# Altium PCB Serial_Sniffer.PcbDoc
Units mm, origin at the board's own origin, x right, y up, seen from the top; angles counter-clockwise.
Board outline 38.86 x 8.64 mm, 2 copper layers (Top Layer, Bottom Layer), stack 1.58 mm thick; 5 components, 5 nets, 12 pads, 0 vias.
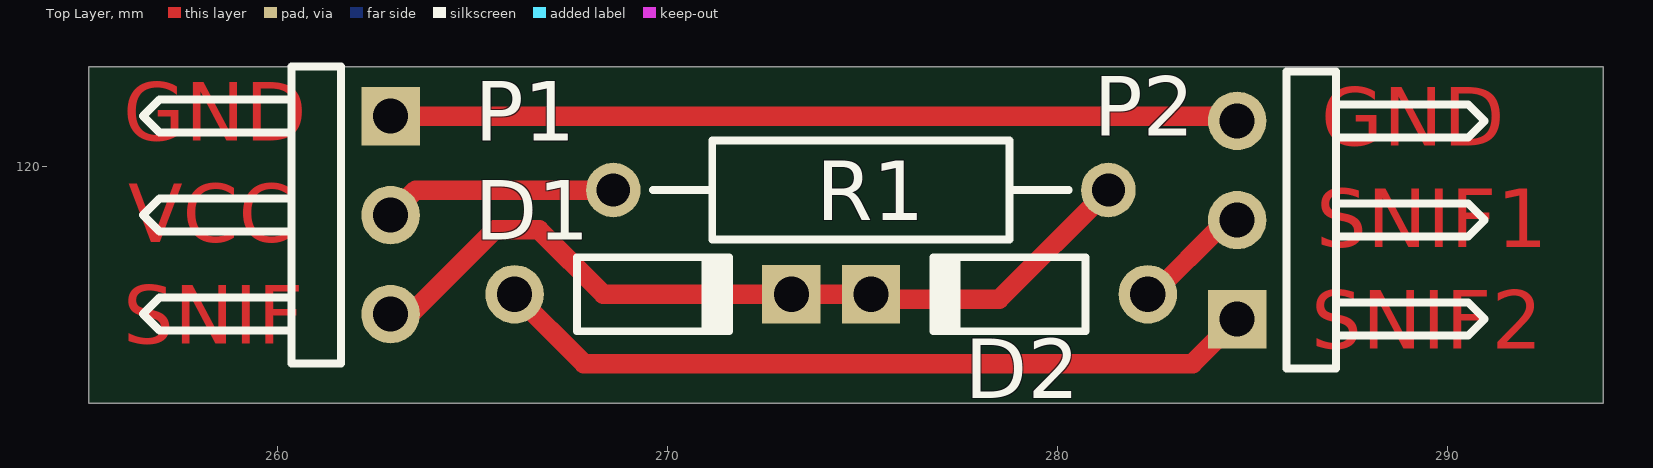
[diagram p0: Top Layer view]
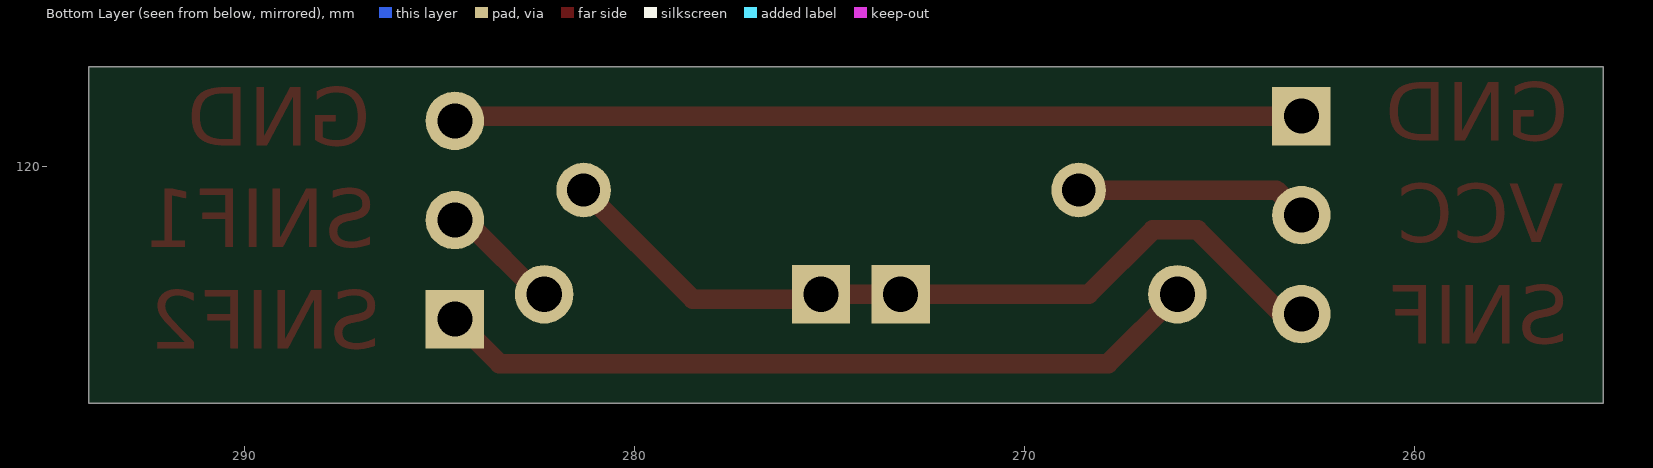
[diagram p1: Bottom Layer view, seen from below]

## Layer stack, top to bottom
Top Solder: solder mask 0.0102, Solder Resist, Dk 3.5
Top Layer: signal copper 0.0356
Dielectric 1: dielectric 1.509, FR-4, Dk 4.8
Bottom Layer: signal copper 0.0356
Bottom Solder: solder mask 0.0102, Solder Resist, Dk 3.5

## Board outline
255.143,122.555 255.143,113.919 294.005,113.919 294.005,122.555

## Design rules (kind name [scope] priority, off if disabled: settings)
Clearance [All] p1: gap=0.3 ignorepadtopadclearanceinfootprint=FALSE
Height [All] p1: minheight=0 maxheight=60 prefheight=45
PolygonConnect [All] p1: connectstyle=Relief reliefconductorwidth=0.254 reliefentries=4 polygonreliefangle="90 Angle" airgapwidth=0.254
RoutingVias [All] p1: holewidth=0.711 width=1.27 viastyle="Through Hole" minholewidth=0.711 minwidth=1.27 maxholewidth=0.711 maxwidth=1.27
SolderMaskExpansion [All] p1: expansion=0.102
Width [All] p1: maxlimit=1 minlimit=0.254 preferedwidth=0.5
29 further rules are at their usual default settings.

## Classes and differential pairs
component class Serial_Sniffer: D1 D2 P1 P2

## Components (designator, comment, footprint, x,y, rotation, side; value= is the part's Value field where it differs from the comment)
D1 "Diode 1N4148" DO-35 269.621,116.713 r0 top
D2 "Diode 1N4148" DO-35 278.765,116.713 r180 top
P1 "Header 3H" HDR1X3H 262.89,121.285 r270 top
P2 "Header 3H" HDR1X3H 284.607,116.078 r90 top
R1 "Res Semi" AXIAL-0.5 274.955,119.387 r0 top value=1K

## Footprints (in the part's own frame and the unit in brackets; to place one, negate y for a bottom-side part, rotate by r counter-clockwise, add the part's x,y. Pads: shape width x height; smd on the part's side, far side on the other; paste and mask are expansions set on the pad)
AXIAL-0.5 [mm] "Axial Device, Thru-Hole; 2 Leads; 0.5 in Pin Spacing"
  round 1.4 hole 0.85: 1(-6.35,0) 2(6.35,0)
  silkscreen extent -5.33,-1.27 5.33,1.27
DO-35 [mm] "Diode, Axial; Body 3.8 x 1.9 mm (LxDia. max), Lead Dia. 0.53 mm (max)"
  round 1.5 hole 0.9: 1(-3.55,0)
  rect 1.5x1.5 hole 0.9: 2(3.55,0)
  silkscreen extent -1.95,-0.95 2.05,0.95
HDR1X3H [mm] "Connector; Header; 3 Position; Right Angle"
  rect 1.5x1.5 hole 0.9: 1(0,0)
  round 1.5 hole 0.9: 2(2.54,0) 3(5.08,0)
  silkscreen extent -1.27,-6.35 6.35,-1.27

## Part data
D1 D2: "High Conductance Fast Diode", Code_JEDEC=DO-204-AH, ComponentLink1Description="Manufacturer Link", ComponentLink1URL=http://www.fairchildsemi.com/, ComponentLink2Description=Datasheet, ComponentLink2URL=http://www.fairchildsemi.com/ds/1N%2F1N4148.pdf, DatasheetVersion=1997, LatestRevisionDate=17-Jul-2002, LatestRevisionNote="Re-released for DXP Platform.", PackageDescription="Diode, Axial; Body 3.8 x 1.9 mm (LxDia. max), Lead Dia. 0.53 mm (max)", PackageReference=DO-35, Published=8-Jun-2000, Publisher="Altium Limited"
P1 P2: "Header, 3-Pin, Right Angle", LatestRevisionDate=17-Jul-2002, LatestRevisionNote="Re-released for DXP Platform.", Publisher="Altium Limited"
R1: "Semiconductor Resistor", LatestRevisionDate=17-Jul-2002, LatestRevisionNote="Re-released for DXP Platform.", PackageDescription="Axial Device, Thru-Hole; 2 Leads; 0.5 in Pin Spacing", PackageReference=AXIAL-0.5, Published=8-Jun-2000, Publisher="Altium Limited"

## Nets (pads, with @x,y where several pads share a name; then routed paths per layer and width w, separated by ;. In a path a pad name is that pad's centre, name@x,y a point inside that pad or via, vN(x,y) a via of type N, cw(c..) or ccw(c..) an arc to the next point about the centre after c; other vN are vias at no path point)
GND: P1.1 P2.3 | length 21.8
  Top Layer w0.5: P1.1 284.48,121.285 P2.3
RX_DEVICE: D1.1 P2.1 | length 19.7
  Top Layer w0.5: D1.1 267.849,114.935 283.464,114.935 P2.1
RX_SNIFFER: D1.2 D2.2 P1.3 R1.2 | length 21.2
  Top Layer w0.5: P1.3 263.398,116.205 265.557,118.364 266.7,118.364 268.351,116.713 D1.2 275.088,116.713 275.215,116.586 278.504,116.586 R1.2
TX_DEVICE: D2.1 P2.2 | length 3.3
  Top Layer w0.3: P2.2@284.48,118.745 P2.2
  Top Layer w0.5: D2.1@282.315,116.586 284.347,118.618 P2.2
VCC: P1.2 R1.1 | length 6
  Top Layer w0.5: P1.2 263.532,119.387 R1.1

## Other copper
Top Layer:
  text "GND" at 256.032,120.65 h1.5
  text "GND" at 286.766,120.523 h1.5
  text "VCC" at 256.159,118.046 h1.5
  text "SNIF1" at 286.639,117.919 h1.5
  text "SNIF" at 256.032,115.443 h1.5
  text "SNIF2" at 286.512,115.316 h1.5